# EAGLE board arduinoRGBkaleidoscopeCkt2_v4 (EAGLE 9.2.2)
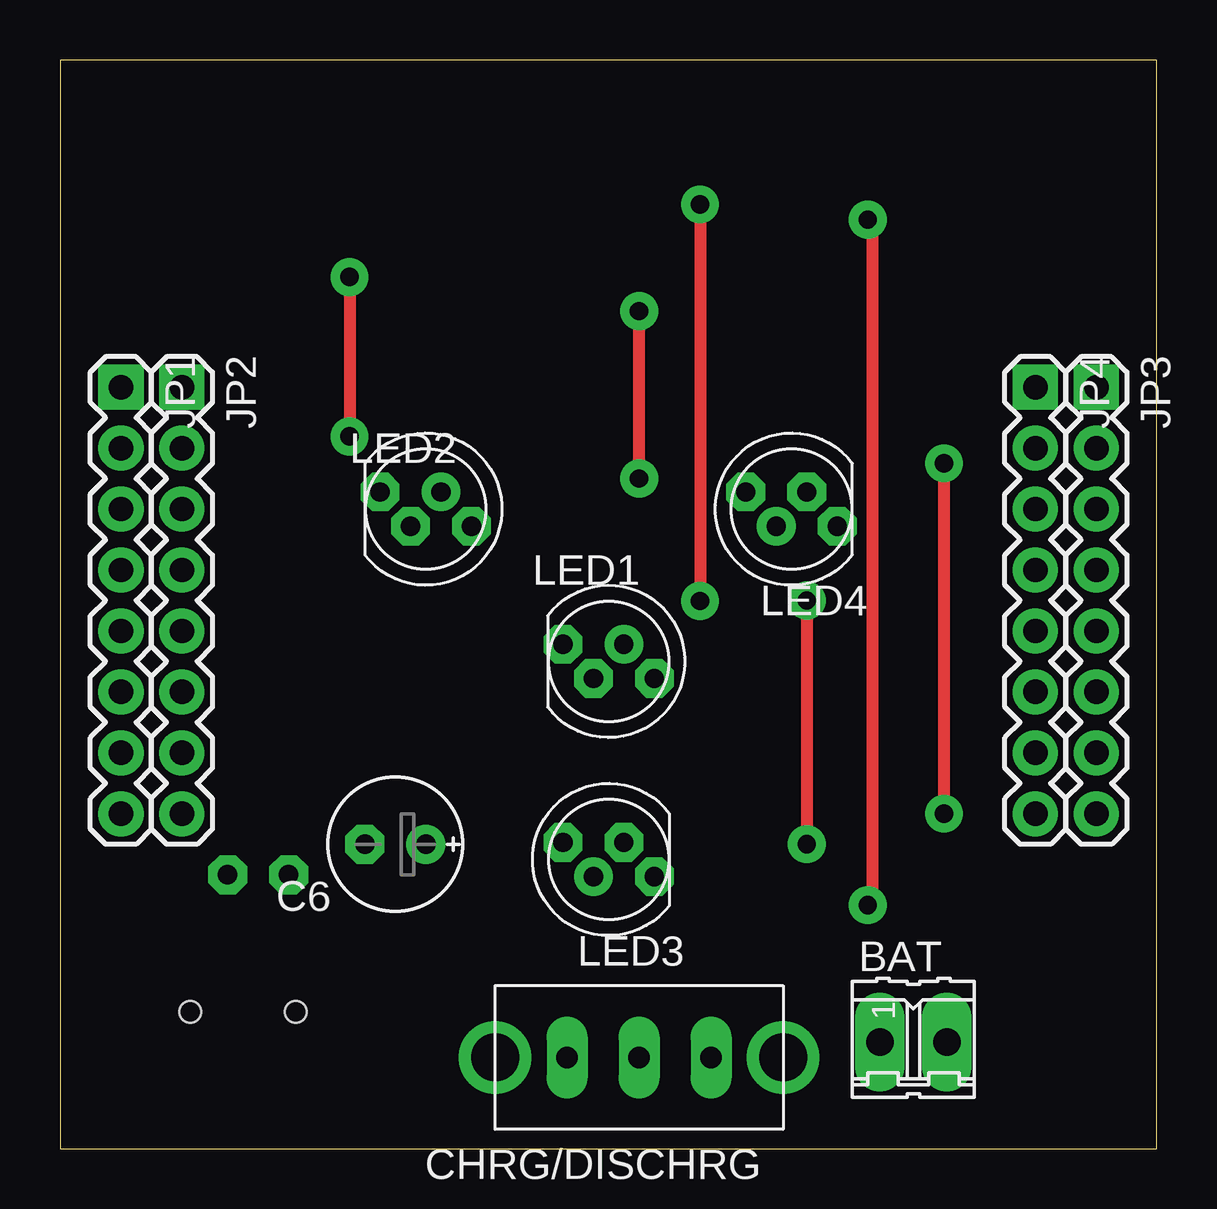
[diagram p0: board, top side]
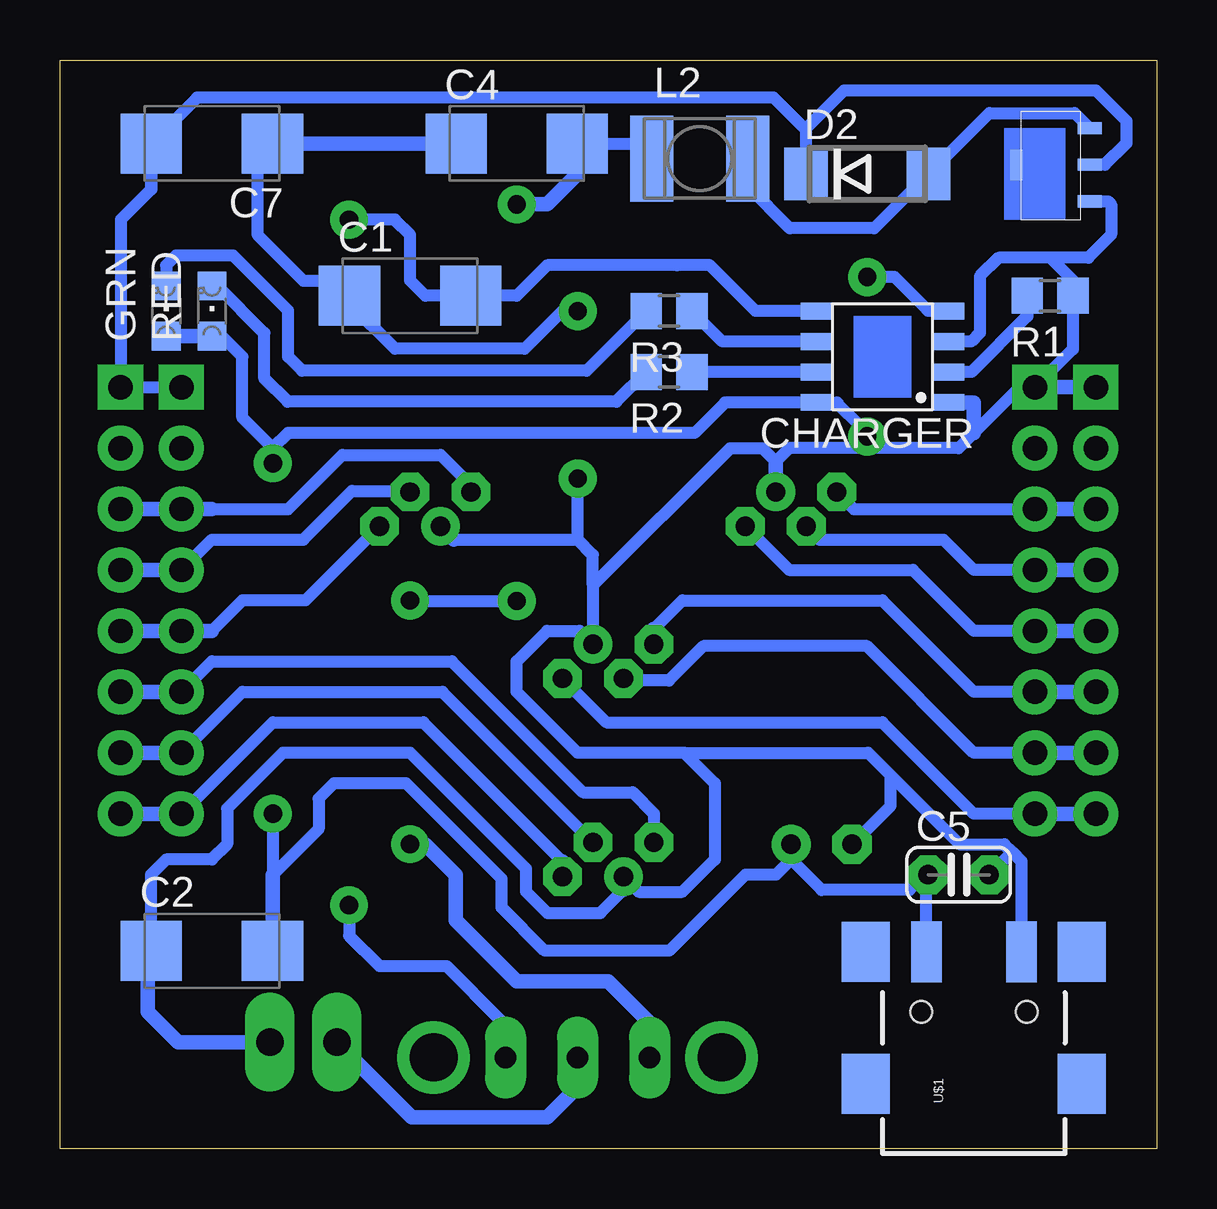
[diagram p1: board, bottom side, seen from below]

Size 45.7 x 45.39 mm. Coordinates in mm from the lower left corner, seen from the top.
Outline: 0,0 45.7,0 45.7,45.39 0,45.39 0,0
Copper layers (1*16): Top 0.035mm / dielectric 1.5mm / Bottom 0.035mm
Design rules "default *": minimum track width 6mil, minimum drill 0.35mm, track to track 16mil, track to pad 16mil, pad to pad 16mil, via to via 16mil, smd to smd 16mil, copper to edge 40mil, drill to drill 8mil, minimum pad ring 16mil, minimum via ring 16mil, stop-mask expansion 4mil, vias tented up to drill 0mil, thermal gap 10mil
Net classes: 1 Power: width 0.508 mm

## Footprints (pad centres in the part's own frame; a part is rotated, then mirrored left to right if it is on the bottom)
02P = drill 1.143 long: 1 -1.397,0; 2 1.397,0
BL8530_5V = smd 0.508 x 1.016: P$1 0.762,-0.381; P$2 2.286,-0.381; P$3 3.81,-0.381 | smd 1.27 x 0.508: P$4 2.286,2.667
C/6032-28R = smd 2.55 x 2.5: + 2.525,0; - -2.525,0
C025-024X044 = drill 0.813 octagon: 1 -1.27,0; 2 1.27,0
E2,5-6E = drill 0.813 pad 1.575: + -1.27,0 | drill 0.813 pad 1.575 octagon: - 1.27,0
SOP-8 = smd 1.3 x 0.7: 1 -2.75,1.905; 2 -2.75,0.635; 3 -2.75,-0.635; 4 -2.75,-1.905; 5 2.75,-1.905; 6 2.75,-0.635; 7 2.75,0.635; 8 2.75,1.905
BIGSWITCH = drill 0.9 long: 1 -3,0; 2 0,0; 3 3,0 | drill 2 pad 2.184: TAB1 -6,0; TAB2 6,0
DO214AA = smd 1.8 x 2.2: A 2.55,0; C -2.55,0
CHIPLED_0805 = smd 1.2 x 1.2: A 0,-1.05; C 0,1.05
1X08 = drill 1.016 pad 1.88 square: 1 0,0 | drill 1.016 pad 1.88: 2 2.54,0; 3 5.08,0; 4 7.62,0; 5 10.16,0; 6 12.7,0; 7 15.24,0; 8 17.78,0
L4532P = smd 1.8 x 3.6: 1 -2,0; 2 2,0
LED5MMRGB = drill 0.8 pad 0.813 octagon: P$1 -1.905,0.714; P$2 -0.635,-0.714; P$4 1.905,-0.714 | drill 0.8 pad 0.813: P$3 0.635,0.714
R0805 = smd 1.3 x 1.5: 1 -0.95,0; 2 0.95,0
USB(POWER) = smd 2.54 x 1.27: GND 2.5,-1.981; VBUS 2.5,1.981 | smd 2.5 x 2: GND@1 -3,-4.5; GND@2 -3,4.5; GND@3 2.5,4.5; GND@4 2.5,-4.5 | hole 0.9: 0,2.2; 0,-2.2

## Placement (x,y rotation side)
BAT  [02P]  35.56,4.45 0 top
BOOST  BL8530_5V  [BL8530_5V]  3.17,38.73 90 bottom
C1  10u  [C/6032-28R]  31.11,35.56 0 bottom
C2  10u  [C/6032-28R]  39.37,8.26 0 bottom
C4  10u  [C/6032-28R]  26.67,41.91 0 bottom
C5  [C025-024X044]  8.26,11.43 0 bottom
C6  [E2,5-6E]  13.97,12.7 180 top
C7  100u  [C/6032-28R]  39.37,41.91 180 bottom
CHARGER  TP4056  [SOP-8]  11.43,33.02 180 bottom
CHRG/DISCHRG  SLIDESWITCH-BIG  [BIGSWITCH]  24.13,3.81 180 top
D2  [DO214AA]  12.06,40.64 0 bottom
GRN  LED3MM  [CHIPLED_0805]  41.27,34.92 0 bottom
JP1  [1X08]  2.54,31.75 270 top
JP2  [1X08]  5.08,31.75 270 top
JP3  [1X08]  43.18,31.75 270 top
JP4  [1X08]  40.64,31.75 270 top
L2  47uH  [L4532P]  19.05,41.27 0 bottom
LED1  5MMRGBLED  [LED5MMRGB]  22.86,20.32 0 top
LED2  5MMRGBLED  [LED5MMRGB]  15.24,26.67 0 top
LED3  5MMRGBLED  [LED5MMRGB]  22.86,12.06 180 top
LED4  5MMRGBLED  [LED5MMRGB]  30.48,26.67 180 top
R1  [R0805]  4.45,35.56 180 bottom
R2  470  [R0805]  20.32,32.38 180 bottom
R3  470  [R0805]  20.32,34.92 180 bottom
RED  LED3MM  [CHIPLED_0805]  39.37,34.92 0 bottom
U$1  USB(POWER)  [USB(POWER)]  7.62,5.71 90 bottom

## Library data of the parts
BAT C1 C4 CHRG/DISCHRG R1-R3 = CEDT_JANUARY_2015_v5
BOOST = PSU_TT_SMD
C2 C7 U$1 = CEDT_JANUARY_2015_v7
C5 C6 = rcl; SPICEPREFIX: C
CHARGER = TP4056
D2 = diode
GRN RED = 01_adafruit
JP1-JP4 = SparkFun-Connectors
L2 = rcl
LED1-LED4 = led_rgb

## Nets
B1: JP1.6 JP2.6 LED1.P$1
B2: JP1.3 JP2.3 LED2.P$1
B3: JP3.8 JP4.8 LED3.P$1
B4: JP3.5 JP4.5 LED4.P$1
BAT_OUT [Power]: BAT.1 CHRG/DISCHRG.2
BOOST: C4.+ CHRG/DISCHRG.3 L2.1
CHARGING: C1.+ CHARGER.5 CHRG/DISCHRG.1
G1: JP1.7 JP2.7 LED1.P$2
G2: JP1.4 JP2.4 LED2.P$2
G3: JP3.7 JP4.7 LED3.P$2
G4: JP3.4 JP4.4 LED4.P$2
GND [Power]: BAT.2 BOOST.P$1 C1.- C2.- C4.- C5.2 C6.- C7.- CHARGER.1 CHARGER.3 JP1.1 JP2.1 LED1.P$3 LED2.P$3 LED3.P$3 LED4.P$3 R1.1 U$1.GND
N$1: CHARGER.2 R1.2
N$4: R2.2 RED.C
N$5: CHARGER.7 R2.1
N$6: CHARGER.6 R3.1
N$8: BOOST.P$3 D2.A L2.2
N$13: JP1.2
N$15: GRN.C R3.2
N$22: JP2.2
N$30: JP3.2
N$33: JP4.2
R1: JP1.8 JP2.8 LED1.P$4
R2: JP1.5 JP2.5 LED2.P$4
R3: JP3.6 JP4.6 LED3.P$4
R4: JP3.3 JP4.3 LED4.P$4
VCC [Power]: C2.+ C5.1 C6.+ CHARGER.4 CHARGER.8 GRN.A RED.A U$1.VBUS
VOUT [Power]: BOOST.P$2 C7.+ D2.C JP3.1 JP4.1

## Tracks (layer width: path | path; a pad name or v marks a point on that pad's centre or on a via)
B1
  Bottom 0.508: JP2.6 7.62,19.05 11.43,22.86 19.76,22.86 20.95,21.67
  Bottom 0.61: JP1.6 JP2.6 | LED1.P$1 20.95,21.67
B2
  Bottom 0.508: LED2.P$1 12.62,26.67 JP2.3
  Bottom 0.61: JP1.3 JP2.3
B3
  Bottom 0.508: 24.77,11.99 30.56,17.78 36.83,17.78 JP4.8
  Bottom 0.61: LED3.P$1 24.77,11.99 | JP3.8 JP4.8
B4
  Bottom 0.508: LED4.P$1 35.48,22.86 38.1,22.86 39.37,21.59
  Bottom 0.61: 39.37,21.59 JP4.5 JP3.5
BAT_OUT
  Bottom 0.61: BAT.1 31.04,1.32 25.4,1.32 24.13,2.59 CHRG/DISCHRG.2
BOOST  (via drill 0.76 pad 1.27)
  Top 0.508: v31.11,22.86 v31.11,12.7 | v26.67,39.37 v26.67,22.84
  Bottom 0.508: C4.+ 21.68,41.91 L2.1 | 31.09,22.84 v26.67,22.84
  Bottom 0.61: C4.+ 24.14,40.62 25.4,39.37 v26.67,39.37 | v31.11,22.86 31.09,22.84 | 21.13,4.27 CHRG/DISCHRG.3 21.13,5.25 22.86,6.99 26.67,6.99 29.21,9.53 29.21,11.43 30.48,12.7 v31.11,12.7
CHARGING  (via drill 0.76 pad 1.27)
  Top 0.508: v33.66,38.73 33.85,38.73 33.85,10.16 v33.66,10.16
  Bottom 0.508: CHARGER.5 16.72,34.92 18.65,36.85 19.96,36.85 19.98,36.83 25.4,36.83 26.67,35.56 C1.+ 30.48,35.56 31.11,36.2 31.11,38.1 31.75,38.73 v33.66,38.73 | CHRG/DISCHRG.1 27.33,4.01 27.33,5.34 29.6,7.62 32.38,7.62 33.66,8.89 v33.66,10.16
G1
  Bottom 0.508: JP2.7 7.62,16.51 12.06,20.95 18.89,20.95 20.33,19.52 21.58,19.52
  Bottom 0.61: JP1.7 JP2.7 | 21.58,19.52 21.67,19.61 LED1.P$2
G2
  Bottom 0.508: JP2.4 7.62,24.13 8.89,25.4 14.05,25.4 LED2.P$2
  Bottom 0.61: JP1.4 JP2.4
G3
  Bottom 0.508: JP4.7 38.1,19.05 29.77,19.05 LED3.P$2
  Bottom 0.61: JP3.7 JP4.7
G4
  Bottom 0.508: JP4.4 39.37,25.4 35.56,25.4 33.54,27.42 31.78,27.42 31.74,27.38 LED4.P$2
  Bottom 0.61: JP3.4 JP4.4
GND  (via drill 0.76 pad 1.27)
  Top 0.508: v24.13,27.94 v24.13,34.92
  Bottom 0.508: 23.5,23.5 LED1.P$3 24.05,21.59 25.4,21.59 26.67,20.32 26.67,19.05 24.13,16.51 19.68,16.51 | 19.68,16.51 18.41,15.24 18.41,12.06 19.76,10.72 21.59,10.72 LED3.P$3 | C2.- 41.9,11.41 41.91,11.43 41.27,12.06 39.37,12.06 38.73,12.7 38.73,14.18 36.41,16.51 31.11,16.51 26.28,11.68 26.28,10.72 25.39,9.83 23.19,9.83 22.23,10.79 | 19.68,16.51 12.03,16.51 11.1,15.57 | 23.5,23.5 23.5,24.77 24.13,25.4 | 23.5,23.5 17.78,29.21 16.43,29.21 15.88,28.65 15.32,29.21 8.26,29.21 7.62,29.84 5.71,31.75 JP2.1 3.5,33.34 R1.1 3.3,35.75 3.3,36.01 4.45,37.15 | CHARGER.3 7.74,33.66 7.37,34.02 7.37,36.37 6.59,37.15 4.45,37.15 | 11.1,15.57 8.22,12.7 6.35,12.7 6.03,12.38 | 6.03,12.38 5.64,11.99 U$1.GND | 24.13,25.4 v24.13,27.94 | 29.29,25.4 24.13,25.4 | v24.13,34.92 24.77,34.92 26.34,33.35 31.75,33.35 33.64,35.24 C1.- | 36.2,41.26 C7.- 37.48,41.27 37.48,38.12 35.55,36.18 33.64,36.18 C1.- | 34.43,35.56 C1.- | JP1.1 2.59,31.75 | C6.- 11.1,14.31 11.1,15.57 | 6.03,12.38 C5.2 | BOOST.P$1 2.03,39.5 1.91,39.37 1.91,38.1 2.85,37.15 4.45,37.15
  Bottom 0.61: C2.- 42.04,8.11 42.04,5.71 40.77,4.45 BAT.2 | 15.88,28.65 LED2.P$3 | 22.23,10.92 LED3.P$3 22.23,10.79 | CHARGER.1 7.62,31.11 7.62,29.84 | 2.59,31.75 JP2.1 | LED4.P$3 29.29,25.4 | C4.- C7.-
N$1
  Bottom 0.508: R1.2 5.39,34.7 7.71,32.38 8.26,32.38
  Bottom 0.61: 8.26,32.38 CHARGER.2
N$4
  Bottom 0.508: R2.2 22.52,31.14 36.22,31.14 37.19,32.11 37.19,34.01 39.15,35.98 RED.C
N$5
  Bottom 0.508: CHARGER.7 R2.1
N$6
  Bottom 0.508: R3.1 18.1,33.66 CHARGER.6
N$8
  Bottom 0.508: 16.41,40.64 L2.2 17.05,40.14 15.29,38.38 11.78,38.38 D2.A 6.97,43.18 3.43,43.18 BOOST.P$3
  Bottom 0.61: 9.26,40.64 D2.A
N$15
  Bottom 0.508: R3.2 23.76,32.44 35.61,32.44 36.2,33.02 36.2,34.95 38.48,37.23 40.87,37.23 41.27,36.83 GRN.C | GRN.C 41.27,36.1 | 41.27,36.2 GRN.C
R1
  Bottom 0.508: JP2.8 7.62,13.97 11.43,17.78 22.94,17.78 LED1.P$4
  Bottom 0.61: JP1.8 JP2.8
R2
  Bottom 0.508: JP2.5 7.62,21.59 10.16,24.13 15.32,24.13 LED2.P$4
  Bottom 0.61: JP1.5 JP2.5
R3
  Bottom 0.508: LED3.P$4 20.95,13.97 21.84,14.86 23.92,14.86 29.38,20.32 39.37,20.32 JP4.6
  Bottom 0.61: JP3.6 JP4.6
R4
  Bottom 0.508: 39.37,26.67 36.2,26.67 33.93,28.93 29.84,28.93 28.57,27.66 LED4.P$4 | JP3.3 43.11,26.67
  Bottom 0.61: 39.37,26.67 JP4.3 43.11,26.67
VCC  (via drill 0.76 pad 1.27)
  Top 0.508: v36.83,28.57 v36.83,13.97 | v12.06,36.34 v12.06,29.7
  Bottom 0.508: v36.83,13.97 36.83,11.43 34.92,13.34 34.92,14.61 34.29,15.24 31.28,15.24 27.3,11.26 27.3,10.06 25.5,8.26 20.32,8.26 17.14,11.43 15.88,11.43 15.24,12.06 | 36.83,9.53 C2.+ | v12.06,29.7 12.06,29.84 12.88,30.66 12.9,30.66 13.29,31.05 13.29,31.07 13.34,31.11 CHARGER.8 17.99,31.11 19.26,29.84 36.2,29.84 36.83,29.21 38.1,30.48 38.1,33.02 38.95,33.88 RED.A | CHARGER.4 9.53,34.92 9.57,34.97 9.57,34.99 10.92,36.34 v12.06,36.34 | U$1.VBUS 9.6,11.51 | C6.+ 15.24,12.06 | 9.6,11.51 C5.1 | 9.6,11.51 10.31,10.79 13.97,10.79 15.24,12.06
  Bottom 0.61: 36.83,29.21 v36.83,28.57 | C2.+ 36.84,10.73 36.83,10.75 36.83,11.43 | GRN.A RED.A
VOUT
  Bottom 0.508: C7.+ 41.9,40.01 43.16,38.74 43.16,31.75 | 43.16,31.75 JP4.1 | 41.9,41.31 C7.+ | 41.9,39.99 C7.+ | JP3.1 43.16,31.75 | 14.61,42.55 14.62,42.53 D2.C | 14.61,42.55 14.69,42.55 15.96,43.82 39.98,43.82 C7.+ | 14.61,42.55 13.03,44.12 2.54,44.12 1.27,42.85 1.27,41.91 2.16,41.02 BOOST.P$2
(copper drawn outside any net)
  shapes: Bottom area x1